# EAGLE board waterlevel (EAGLE 6.2)
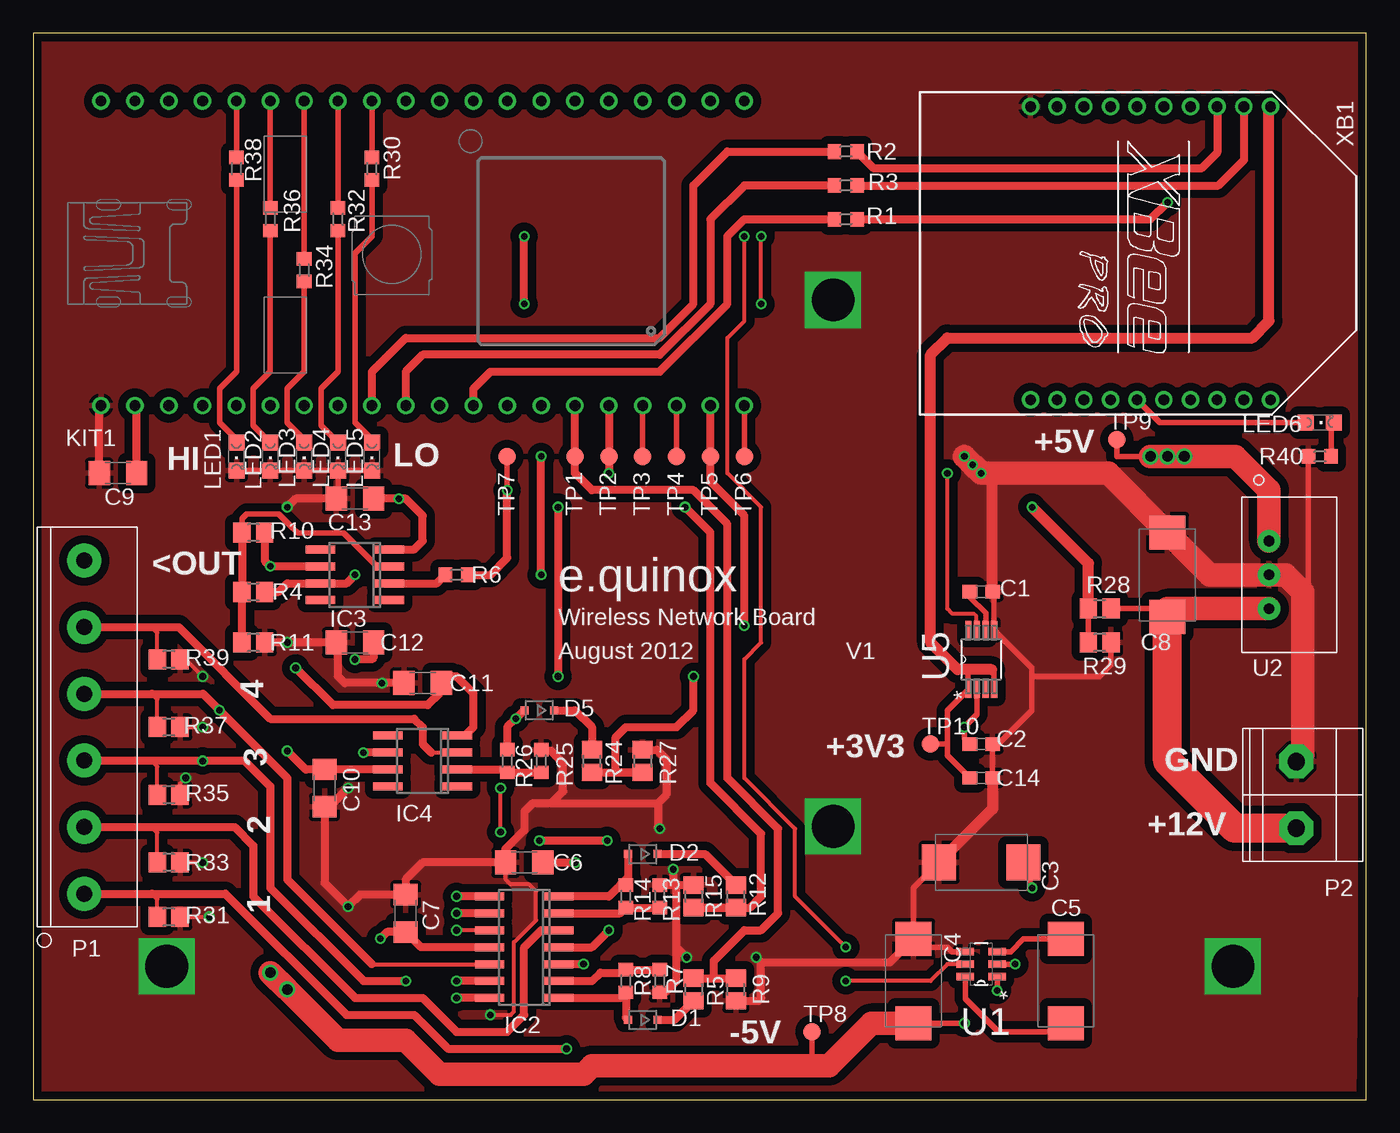
[diagram p0: board, top side]
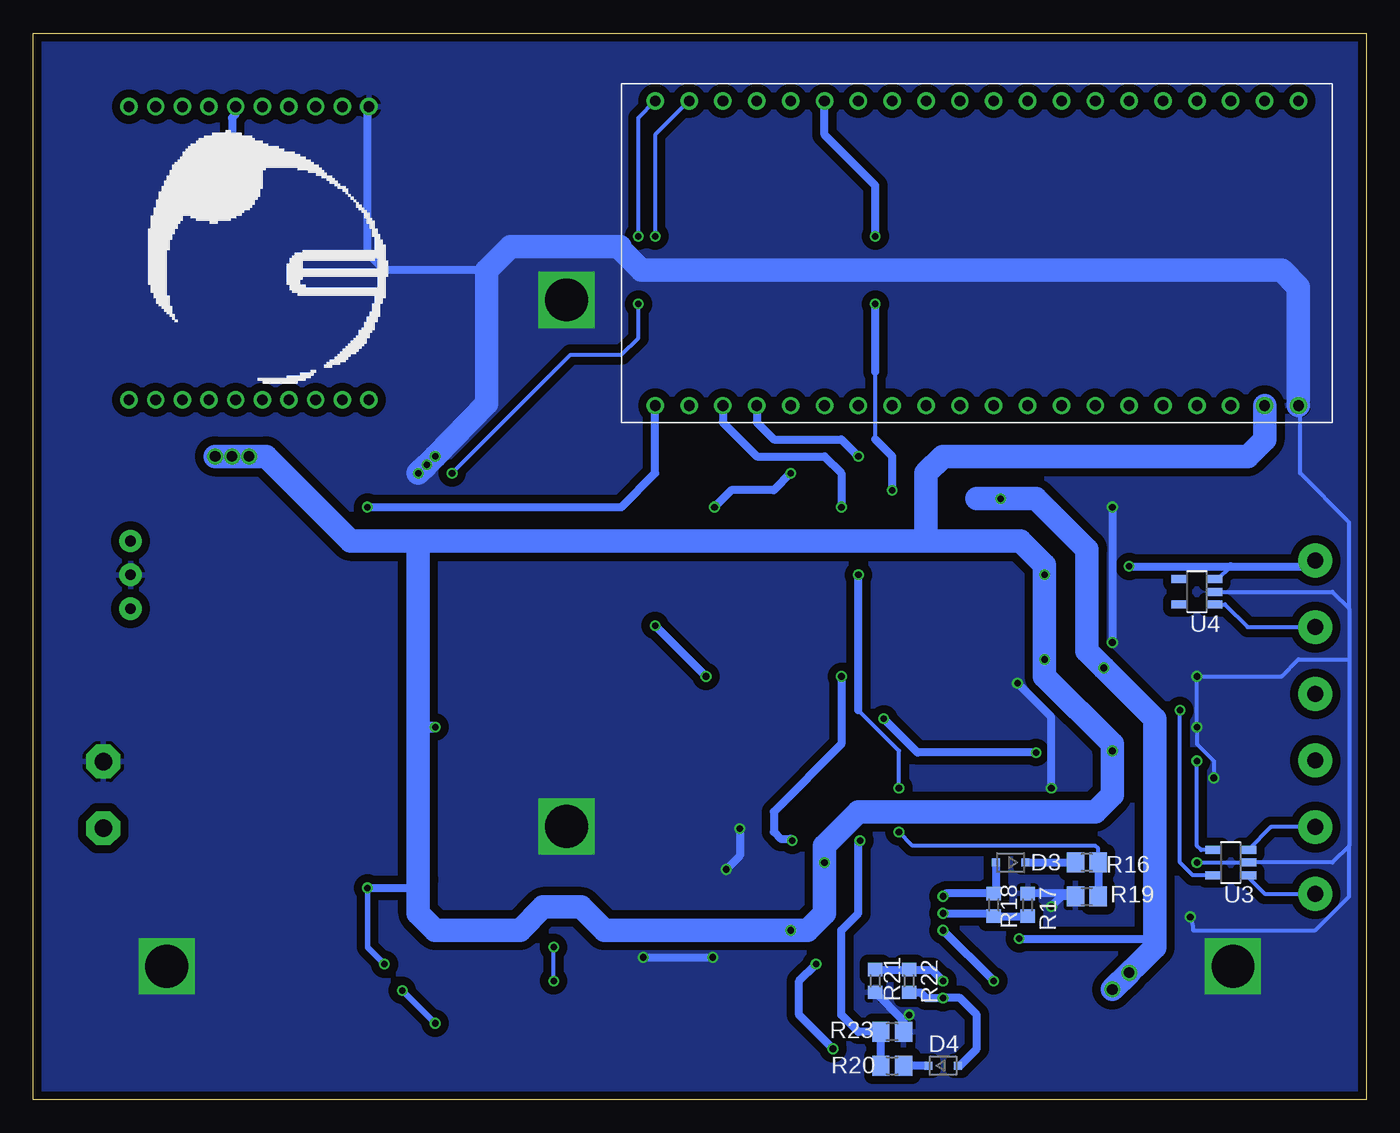
[diagram p1: board, bottom side, seen from below]

Size 100 x 80 mm. Coordinates in mm from the lower left corner, seen from the top.
Outline: 0,0 100,0 100,80 0,80 0,0
Copper layers (1*16): Top 0.035mm / dielectric 1.5mm / Bottom 0.035mm
Design rules: minimum track width 6mil, minimum drill 12mil, track to track 6mil, track to pad 6mil, pad to pad 6mil, via to via 6mil, smd to smd 0mil, copper to edge 10mil, drill to drill 10mil, minimum pad ring 10mil, minimum via ring 6mil, stop-mask expansion 2mil, vias tented up to drill 100mil, thermal gap 10mil

## Footprints (pad centres in the part's own frame; a part is rotated, then mirrored left to right if it is on the bottom)
C0603 = smd 1.1 x 1: 1 -0.85,0; 2 0.85,0
D/7343-31R = smd 2.55 x 2.7: + 3.175,0; - -3.175,0
C1206 = smd 1.6 x 1.8: 1 -1.4,0; 2 1.4,0
SOD323-R = smd 0.6 x 0.6: A 1.1,0; C -1.1,0
SO14 = smd 0.6 x 2.2: 1 -3.81,-2.6; 2 -2.54,-2.6; 3 -1.27,-2.6; 4 0,-2.6; 5 1.27,-2.6; 6 2.54,-2.6; 7 3.81,-2.6; 8 3.81,2.6; 9 2.54,2.6; 10 1.27,2.6; 11 0,2.6; 12 -1.27,2.6; 13 -2.54,2.6; 14 -3.81,2.6
SO08 = smd 0.6 x 2.2: 1 -1.905,-2.6; 2 -0.635,-2.6; 3 0.635,-2.6; 4 1.905,-2.6; 5 1.905,2.6; 6 0.635,2.6; 7 -0.635,2.6; 8 -1.905,2.6
MBED-KIT = drill 0.8: D+ 11.43,1.27; D- 11.43,3.81; GND -11.43,24.13; IF+ 11.43,16.51; IF- 11.43,19.05; NR -11.43,16.51; P$5 -11.43,13.97; P$6 -11.43,11.43; P$7 -11.43,8.89; P$8 -11.43,6.35; P$9 -11.43,3.81; P$10 -11.43,1.27; P$11 -11.43,-1.27; P$12 -11.43,-3.81; P$13 -11.43,-6.35; P$14 -11.43,-8.89; P$15 -11.43,-11.43; P$16 -11.43,-13.97; P$17 -11.43,-16.51; P$18 -11.43,-19.05; P$19 -11.43,-21.59; P$20 -11.43,-24.13; P$21 11.43,-24.13; P$22 11.43,-21.59; P$23 11.43,-19.05; P$24 11.43,-16.51; P$25 11.43,-13.97; P$26 11.43,-11.43; P$27 11.43,-8.89; P$28 11.43,-6.35; P$29 11.43,-3.81; P$30 11.43,-1.27; RD+ 11.43,11.43; RD- 11.43,13.97; TD+ 11.43,6.35; TD- 11.43,8.89; VB -11.43,19.05; VIN -11.43,21.59; VOUT 11.43,24.13; VU 11.43,21.59
CHIPLED_0805 = smd 1.2 x 1.2: A 0,-1.05; C 0,1.05
CAMDEN-CTB5000 = drill 1.2 pad 2.54: 1 -12.5,0; 2 -7.5,0; 3 -2.5,0; 4 2.5,0; 5 7.5,0; 6 12.5,0
CTB1500-2 = drill 1.3 pad 2.54 octagon: P$1 -2.5,0.5; P$2 2.5,0.5
R0603 = smd 1 x 1.1: 1 -0.85,0; 2 0.85,0
R0805 = smd 1.3 x 1.5: 1 -0.85,0; 2 0.85,0
TP13R = smd 1.3 x 1.3: TP 0,0
SOP95P275X110-6N = smd 1.321 x 0.559: 1 -1.194,0.94; 2 -1.194,0; 3 -1.194,-0.94; 4 1.194,-0.94; 5 1.194,0; 6 1.194,0.94
XP-SR-SERIES = drill 0.8 pad 1.676: 1 2.54,0; 2 0,0; 3 -2.54,0
SOT23-5 = smd 0.6 x 1.2: 1 -0.95,-1.306; 2 0,-1.306; 3 0.95,-1.306; 4 0.95,1.306; 5 -0.95,1.306
SOP65P490X110-8N = smd 1.372 x 0.457: 1 -2.21,0.965; 2 -2.21,0.33; 3 -2.21,-0.33; 4 -2.21,-0.965; 5 2.21,-0.965; 6 2.21,-0.33; 7 2.21,0.33; 8 2.21,0.965
XBEE-PRO = drill 0.8 pad 1.27: 1 -11,9; 2 -11,7; 3 -11,5; 4 -11,3; 5 -11,1; 6 -11,-1; 7 -11,-3; 8 -11,-5; 9 -11,-7; 10 -11,-9; 11 11,-9; 12 11,-7; 13 11,-5; 14 11,-3; 15 11,-1; 16 11,1; 17 11,3; 18 11,5; 19 11,7; 20 11,9

## Placement (x,y rotation side)
C1  33nF  [C0603]  71.12,38.1 0 top
C2  2.2u  [C0603]  71.12,26.67 0 top
C3  10uF  [D/7343-31R]  71.12,17.78 0 top
C4  10uF  [D/7343-31R]  66.04,8.89 270 top
C5  10uF  [D/7343-31R]  77.47,8.89 270 top
C6  100n  [C1206]  36.83,17.78 180 top
C7  100n  [C1206]  27.94,13.97 90 top
C8  47uF  [D/7343-31R]  85.09,39.37 270 top
C9  1uF  [C1206]  6.35,46.99 180 top
C10  100n  [C1206]  21.84,23.37 270 top
C11  100n  [C1206]  29.21,31.24 180 top
C12  100n  [C1206]  24.13,34.29 180 top
C13  100n  [C1206]  24.13,45.09 180 top
C14  2.2u  [C0603]  71.12,24.13 0 top
D1  [SOD323-R]  45.72,5.97 180 top
D2  [SOD323-R]  45.72,18.41 180 top
D3  [SOD323-R]  26.67,17.78 180 bottom
D4  [SOD323-R]  31.75,2.54 0 bottom
D5  [SOD323-R]  37.97,29.21 180 top
IC2  MCP604SL  [SO14]  36.83,11.43 90 top
IC3  MCP601SN  [SO08]  24.13,39.37 90 top
IC4  MCP601SN  [SO08]  29.21,25.4 90 top
KIT1  MBED_NXP_LPC1768  [MBED-KIT]  29.21,63.5 90 top
LED1  RED  [CHIPLED_0805]  15.24,48.26 180 top
LED2  AMBER  [CHIPLED_0805]  17.78,48.26 180 top
LED3  GREEN  [CHIPLED_0805]  20.32,48.26 180 top
LED4  GREEN  [CHIPLED_0805]  22.86,48.26 180 top
LED5  GREEN  [CHIPLED_0805]  25.4,48.26 180 top
LED6  [CHIPLED_0805]  96.52,50.8 270 top
P1  CAMDEN-CTB5000/6  [CAMDEN-CTB5000]  3.81,27.94 90 top
P2  CTB1500/2  [CTB1500-2]  95.25,22.86 90 top
R1  33  [R0603]  60.96,66.04 0 top
R2  33  [R0603]  60.96,71.12 0 top
R3  33  [R0603]  60.96,68.58 0 top
R4  1k  [R0805]  16.51,38.1 0 top
R5  1k  [R0805]  49.53,8.26 270 top
R6  0  [R0603]  31.75,39.37 180 top
R7  DNP  [R0603]  46.99,8.89 90 top
R8  0  [R0603]  44.45,8.89 270 top
R9  1k  [R0805]  52.7,8.26 90 top
R10  100k  [R0805]  16.51,42.55 180 top
R11  1k  [R0805]  16.51,34.29 180 top
R12  1k  [R0805]  52.7,15.24 90 top
R13  DNP  [R0603]  46.99,15.24 270 top
R14  0  [R0603]  44.45,15.24 90 top
R15  1k  [R0805]  49.53,15.24 270 top
R16  1k  [R0805]  20.95,17.78 180 bottom
R17  DNP  [R0603]  25.4,14.61 270 bottom
R18  0  [R0603]  27.94,14.61 90 bottom
R19  1k  [R0805]  20.95,15.24 0 bottom
R20  1k  [R0805]  35.56,2.54 0 bottom
R21  DNP  [R0603]  36.83,8.89 90 bottom
R22  0  [R0603]  34.29,8.89 270 bottom
R23  1k  [R0805]  35.56,5.08 180 bottom
R24  1k  [R0805]  41.91,25.4 90 top
R25  DNP  [R0603]  38.1,25.4 270 top
R26  0  [R0603]  35.56,25.4 90 top
R27  1k  [R0805]  45.72,25.4 270 top
R28  3k  [R0805]  80.01,36.83 0 top
R29  1k  [R0805]  80.01,34.29 180 top
R30  200  [R0603]  25.4,69.85 90 top
R31  1M  [R0805]  10.16,13.7 180 top
R32  200  [R0603]  22.86,66.04 90 top
R33  1M  [R0805]  10.16,17.78 180 top
R34  200  [R0603]  20.32,62.23 90 top
R35  1M  [R0805]  10.16,22.86 180 top
R36  200  [R0603]  17.78,66.04 90 top
R37  1M  [R0805]  10.16,27.94 180 top
R38  200  [R0603]  15.24,69.85 90 top
R39  1M  [R0805]  10.16,33.02 180 top
R40  200  [R0603]  96.52,48.26 0 top
TP1  TPTP13R  [TP13R]  40.64,48.26 0 top
TP2  TPTP13R  [TP13R]  43.18,48.26 0 top
TP3  TPTP13R  [TP13R]  45.72,48.26 0 top
TP4  TPTP13R  [TP13R]  48.26,48.26 0 top
TP5  TPTP13R  [TP13R]  50.8,48.26 0 top
TP6  TPTP13R  [TP13R]  53.34,48.26 0 top
TP7  TPTP13R  [TP13R]  35.56,48.26 0 top
TP8  TPTP13R  [TP13R]  58.42,5.08 0 top
TP9  TPTP13R  [TP13R]  81.28,49.53 0 top
TP10  TPTP13R  [TP13R]  67.31,26.67 0 top
U1  NCP1729SN35T1G  [SOP95P275X110-6N]  71.12,10.16 180 top
U2  SR05S05  [XP-SR-SERIES]  92.71,39.37 90 top
U3  VISHAY-VCUT05A4  [SOT23-5]  10.16,17.78 90 bottom
U4  VISHAY-VCUT05A4  [SOT23-5]  12.7,38.1 90 bottom
U5  LP3981IMM-3.3  [SOP65P490X110-8N]  71.12,33.02 90 top
U$2  [EQNXLOGO]  81.28,62.23 0 bottom
XB1  XBEE-PRO  [XBEE-PRO]  83.82,63.5 270 top

## Library data of the parts
C1 C6 C7 C9-C13 R1-R40 = resistor
C2 C14 = resistor; FARNELL: 1759400
C3-C5 C8 = resistor; FARNELL: 2112950
D1-D5 = diode; FARNELL: 1907691; PART: RB751V40
IC2-IC4 = linear
KIT1 = MBED_v2.1
LED1-LED6 = led
P1 = connectors-terminal; FARNELL: CN11531
P2 U$2 = eko-parts
TP1-TP10 = testpad
U1 = eko-parts; MPN: NCP1729SN35T1G; OC_FARNELL: 1652414; OC_NEWARK: 45J1868; PACKAGE: TSOP-6; SUPPLIER: ON SEMICONDUCTOR
U2 = eko-parts; FARNELL: 1861084
U3 U4 = diodes
U5 = eko-parts; MPN: LP3981IMM-3.3; OC_FARNELL: 1685563; OC_NEWARK: 41K7899; PACKAGE: MSOP-8; SUPPLIER: NationalSemiconductor
XB1 = maxstream; MPN: XBP24-AWI-001; OC_FARNELL: 1337916; OC_NEWARK: 42M2667

## Nets
!XBEE_RESET!: KIT1.P$12 R1.1
+3V3: C14.1 TP10.TP U5.1 U5.4 XB1.1
+5V: C2.1 C3.+ C6.1 C9.1 C10.1 C12.1 IC2.4 IC3.7 IC4.7 KIT1.VIN R4.2 TP9.TP U1.2 U2.1 U5.2
+12V: C8.+ P2.P$1 R28.2 U2.3
-5V: C4.+ C7.1 C11.1 C13.1 IC2.11 IC3.4 IC4.4 TP8.TP U1.1
BAT_LVL: KIT1.P$20 R28.1 R29.2 TP6.TP
GND: C1.2 C2.2 C3.- C4.- C6.2 C7.2 C8.- C9.2 C10.2 C11.2 C12.2 C13.2 C14.2 KIT1.GND LED1.C LED2.C LED3.C LED4.C LED5.C P2.P$2 R7.1 R9.1 R11.1 R13.1 R15.1 R17.1 R19.1 R21.1 R23.1 R25.1 R27.1 R29.1 R31.1 R33.1 R35.1 R37.1 R39.1 R40.1 U1.4 U2.2 U3.2 U4.2 U5.5 XB1.10
LED1: KIT1.RD- R38.2
LED2: KIT1.RD+ R36.2
LED3: KIT1.TD- R34.2
LED4: KIT1.TD+ R32.2
LED5: KIT1.D- R30.2
LVL1: KIT1.P$15 R5.1 R9.2 TP1.TP
LVL2: KIT1.P$16 R12.1 R15.2 TP2.TP
LVL3: KIT1.P$17 R16.1 R19.2 TP3.TP
LVL4: KIT1.P$18 R20.1 R23.2 TP4.TP
LVL5: KIT1.P$19 R24.1 R27.2 TP5.TP
MBED_RX: KIT1.P$10 R3.1
MBED_TX: KIT1.P$9 R2.1
N5V_ON: KIT1.P$22 U1.5
N$1: IC3.2 R6.2
N$2: D2.A IC2.7 R14.2
N$3: D3.A IC2.8 R18.2
N$4: D4.A IC2.14 R22.2
N$5: D5.A IC4.6 R26.2
N$6: IC4.2 R25.2 R26.1
N$7: IC2.13 R21.2 R22.1
N$8: IC2.9 R17.2 R18.1
N$9: IC2.6 R13.2 R14.1
N$10: IC2.2 R7.2 R8.1
N$11: C5.+ U1.6
N$12: D2.C R12.2
N$13: C5.- U1.3
N$14: D1.C R5.2
N$15: D1.A IC2.1 R8.2
N$16: D3.C R16.2
N$17: LED6.A XB1.15
N$18: D4.C R20.2
N$19: R1.2 XB1.5
N$20: D5.C R24.2
N$21: R2.2 XB1.3
N$22: R3.2 XB1.2
N$23: IC3.3 R4.1 R10.2 R11.2
N$24: LED6.C R40.2
N$25: LED5.A R30.1
N$26: LED4.A R32.1
N$27: LED3.A R34.1
N$28: C1.1 U5.6
N$29: LED2.A R36.1
N$30: LED1.A R38.1
NR: KIT1.NR
SENSOR_IN_1: IC2.3 P1.1 R31.2 U3.1
SENSOR_IN_2: IC2.5 P1.2 R33.2 U3.3
SENSOR_IN_3: IC2.10 P1.3 R35.2 U3.4
SENSOR_IN_4: IC2.12 P1.4 R37.2 U3.5
SENSOR_IN_5: IC4.3 P1.5 R39.2 U4.1
SQR_IN: KIT1.P$26 R6.1 TP7.TP
SQR_OUT_AC: IC3.6 P1.6 R10.1 U4.3
VB: KIT1.VB
VO: KIT1.VOUT
VU: KIT1.VU
XBEE_PWR_ON: KIT1.P$21 U5.7

## Tracks (layer width: path | path; a pad name or v marks a point on that pad's centre or on a via)
!XBEE_RESET!
  Top 0.61: KIT1.P$12 33.02,53.34 34.29,54.61 46.99,54.61 52.07,59.69 52.07,64.77 53.34,66.04 R1.1
+3V3
  Top 0.406: 68.58,26.67 68.58,29.21 70.16,30.79 U5.1 70.1,30.89 70.1,32 70.48,32.26 71.88,32.26 72.08,32.05 U5.4 | 68.58,26.67 68.58,25.82 C14.1 | TP10.TP 68.58,26.67
  Top 0.813: 71.88,32.26 69.34,32.26 67.31,34.29 67.31,55.88 68.58,57.15 91.44,57.15 92.71,58.42 92.71,74.39 XB1.1
+5V  (via drill 0.5, 0.8)
  Top 0.406: U1.2 v73.66,10.16 | v74.93,15.88 C3.+ | U5.2 70.79,28.88 v69.85,27.94 69.85,27.09 C2.1 | TP9.TP 81.28,48.26 v83.82,48.26
  Top 0.61: IC4.7 C10.1 20.44,24.77 v19.05,26.16 | R4.2 18.41,38.1 19.05,38.73 IC3.7 23.5,38.73 v24.13,39.37 | C9.1 7.75,51.94 KIT1.VIN | C6.1 v40.64,17.78 | IC2.4 41.91,11.43 v43.18,12.7 | C12.1 25.53,33.15 25.4,33.02 v24.13,33.02
  Top 1.778: U2.1 92.71,45.72 90.17,48.26 v86.36,48.26 v85.09,48.26 v83.82,48.26
  Bottom 0.406: v73.66,10.16 74.93,11.43 v74.93,15.88
  Bottom 0.61: v74.93,15.88 71.75,15.88 71.12,16.51
  Bottom 0.813: 71.12,27.94 v69.85,27.94
  Bottom 1.778: v86.36,48.26 82.55,48.26 76.2,41.91 71.12,41.91 | 71.12,41.91 33.02,41.91 | 33.02,41.91 25.93,41.91 24.13,40.11 v24.13,39.37 v24.13,33.02 24.13,31.75 19.05,26.67 v19.05,26.16 19.05,22.86 20.32,21.59 38.1,21.59 40.64,19.05 v40.64,17.78 40.64,13.97 41.91,12.7 v43.18,12.7 57.15,12.7 58.91,14.46 61.74,14.46 63.5,12.7 69.85,12.7 71.12,13.97 71.12,16.51 71.12,27.94 71.12,41.91 | KIT1.VIN 7.62,49.53 8.89,48.26 31.75,48.26 33.02,46.99 33.02,41.91
+12V
  Top 0.406: 85.09,36.83 R28.2
  Top 1.778: U2.3 85.09,36.83 C8.+
  Top 2.184: P2.P$1 90.13,20.36 85.09,25.4 C8.+
-5V  (via drill 0.5, 0.8)
  Top 0.406: U1.1 v72.31,8.18 | C4.+ v69.85,5.71 | TP8.TP 58.42,2.54
  Top 0.61: IC2.11 29.08,11.43 C7.1 26.54,12.57 v26.04,12.06 | IC4.4 32.38,27.3 33.02,27.94 33.02,30.48 31.75,31.75 31.12,31.75 C11.1 30.61,31.62 30.48,31.75 30.48,30.48 29.59,29.59 22.48,29.59 v19.68,32.38 | C13.1 v27.43,45.09 27.94,45.09 29.21,43.81 29.21,41.91 28.57,41.27 IC3.4
  Top 1.778: C4.+ 62.87,5.71 59.69,2.54 58.42,2.54 41.91,2.54 41.27,1.91 30.48,1.91 27.94,4.45 22.86,4.45 v19.05,8.26 v17.78,9.53
  Bottom 0.406: v69.85,5.71 v72.31,8.18
  Bottom 0.61: v26.04,12.06 16.51,12.06 15.88,12.7
  Bottom 1.778: v17.78,9.53 v19.05,8.26 15.88,11.43 15.88,12.7 15.88,28.57 v19.68,32.38 20.95,33.66 20.95,41.27 24.77,45.09 v27.43,45.09 29.21,45.09
BAT_LVL  (via drill 0.5)
  Top 0.406: R28.1 R29.2 | TP6.TP KIT1.P$20
  Top 0.813: R28.1 79.16,40.22 v74.93,44.45
  Bottom 0.61: v74.93,44.45 55.88,44.45 53.34,46.99 KIT1.P$20
GND  (via drill 0.5, 3.2)
  Top 0.305: v34.29,6.35 35.81,6.35 36.07,6.6 36.07,11.81 37.72,13.46 37.72,15.62 37.21,16.13 35.81,16.13 35.43,16.51 C6.2 | R31.1 v13.2,13.7 | R33.1 v12.7,17.78 | R35.1 11.01,23.71 v11.43,24.13 | R37.1 v12.7,27.94 | R39.1 11.43,33.02 v12.7,31.75
  Top 0.406: U1.4 68.91,11.1 68.58,11.43 66.67,11.43 C4.- 66.04,15.88 C3.- | C1.2 72.08,37.98 U5.5 74.93,32.38 74.93,31.75 | C14.2 C2.2 72.39,26.67 74.93,29.21 74.93,31.75 | R29.1 80.86,32.6 80.01,31.75 74.93,31.75 | LED1.C LED2.C LED3.C LED4.C | LED4.C LED5.C | LED4.C 22.86,45.22 C13.2 | R40.1 95.67,37.25 95.25,36.83
  Top 0.61: C9.2 4.95,51.94 KIT1.GND | C11.2 v26.16,31.24 23.37,31.24 22.86,31.75 22.86,34.16 C12.2 v19.05,34.29 R11.1 | 38.86,22.23 39.75,23.11 39.75,25.27 38.86,26.16 38.19,26.16 R25.1 | R27.1 46.77,26.25 47.5,25.53 47.5,22.86 46.86,22.23 | 38.86,22.23 46.86,22.23 | R13.1 48.26,16.09 | 48.26,16.09 R15.1 | R7.1 47.41,8.04 48.26,8.89 48.26,11.43 | 48.26,11.43 48.26,16.09 | R9.1 54.4,7.41 54.61,7.62 54.61,10.29 | 54.61,10.29 v54.23,10.67 | v49.02,10.67 48.26,11.43 | v23.62,23.37 22.22,21.97 C10.2 21.84,16.26 v23.62,14.48 24.51,15.37 C7.2 27.94,16.51 29.21,17.78 C6.2 35.43,18.79 36.83,20.19 36.83,21.59 37.47,22.23 38.86,22.23 | C13.2 19.68,45.09 v19.05,44.45 | 46.86,22.23 46.86,20.45 v46.99,20.32 | v48.01,17.27 48.01,16.34 48.26,16.09 | 54.61,10.29 64.26,10.29 C4.-
  Top 0.813: C1.2 71.97,46.57 72.39,46.99 | C14.2 71.97,21.8 C3.-
  Top 1.778: P2.P$2 95.25,25.86 95.25,36.83 95.25,38.1 93.98,39.37 U2.2 88.27,39.37 C8.- 80.64,46.99 72.39,46.99 v71.12,46.99 v70.48,47.62 v69.85,48.26
  Bottom 0.305: 34.71,5.92 34.71,5.93 v34.29,6.35 | U4.2 2.54,38.1 1.27,36.83 | 1.27,36.83 1.27,33.02 | 1.27,33.02 1.27,19.05 | 1.27,19.05 2.54,17.78 U3.2 v12.7,17.78 | 1.27,36.83 1.27,43.31 C9.2 4.95,51.94 KIT1.GND | v11.43,24.13 11.43,25.4 12.7,26.67 v12.7,27.94 v12.7,31.75 6.35,31.75 5.08,33.02 1.27,33.02 | v13.2,13.7 13,13 13,12.7 3.81,12.7 1.27,15.24 1.27,19.05
  Bottom 0.61: R23.1 34.71,5.92 R21.1 | R17.1 22.02,15.46 R19.1 22.86,15.24 v23.62,14.48 | v54.23,10.67 v49.02,10.67 | v23.62,23.37 23.62,28.7 v26.16,31.24 | v19.05,44.45 v19.05,34.29 | v46.99,20.32 46.99,18.29 v48.01,17.27 | 56,64 64.27,64 66.04,62.23 73.66,62.23 74.93,63.5 74.93,74.39 XB1.10
  Bottom 1.778: KIT1.GND 5.08,60.96 6.35,62.23 54.38,62.23 56,63.85 56,64 64.2,64 66,62.2 66,52.23 v69.85,48.26 v70.48,47.62 v71.12,46.99
  other vias: 60,60 10,10 90,10 60,20.5
  pour Bottom (isolate 0.61): 0,80.01 99.83,80.01 100.33,0 0,0
  pour Top (isolate 0.61): 0,80.01 0,0 99.06,0 100.06,80.01
LED1
  Top 0.406: KIT1.RD- R38.2
LED2
  Top 0.406: KIT1.RD+ R36.2
LED3
  Top 0.406: KIT1.TD- R34.2
LED4
  Top 0.406: KIT1.TD+ R32.2
LED5
  Top 0.406: KIT1.D- R30.2
LVL1
  Top 0.61: R9.2 R5.1 51.02,9.11 51.05,9.14 51.05,10.41 53.34,12.7 54.61,12.7 55.88,13.97 55.88,20.32 52.07,24.13 52.07,43.18 49.53,45.72 41.91,45.72 40.64,46.99 TP1.TP KIT1.P$15
LVL2  (via drill 0.5)
  Top 0.61: R12.1 R15.2 53.76,14.39 54.61,15.24 54.61,19.94 50.8,23.75 50.8,42.55 v48.9,44.45 | KIT1.P$16 TP2.TP v43.18,46.99
  Bottom 0.61: v43.18,46.99 44.45,45.72 47.62,45.72 v48.9,44.45
LVL3  (via drill 0.5)
  Top 0.305: v35.05,20.07 v35.05,23.37
  Top 0.406: TP3.TP KIT1.P$17
  Top 0.61: v38.1,39.37 v38.1,48.26
  Bottom 0.305: R16.1 20.11,18.84 20.32,19.05 34.04,19.05 v35.05,20.07 | v35.05,23.37 35.05,26.16 38.1,29.21
  Bottom 0.61: R16.1 R19.2 | 38.1,29.21 v38.1,39.37 | KIT1.P$17 45.72,50.8 44.45,49.53 39.37,49.53 v38.1,48.26
LVL4  (via drill 0.5)
  Top 0.406: TP4.TP KIT1.P$18
  Top 0.61: v37.97,19.43 v43.05,19.43 | v39.37,44.45 v39.37,31.75
  Bottom 0.61: R20.1 R23.2 38.1,5.08 39.37,6.35 39.37,12.7 38.1,13.97 38.1,19.3 v37.97,19.43 | KIT1.P$18 48.26,50.8 45.72,48.26 40.64,48.26 39.37,46.99 v39.37,44.45 | v39.37,31.75 39.37,26.67 44.45,21.59 44.45,20.07 43.94,19.56 43.18,19.56 v43.05,19.43
LVL5  (via drill 0.5)
  Top 0.61: R24.1 R27.2 43.78,24.55 43.69,24.64 43.69,27.18 44.45,27.94 48.26,27.94 49.53,29.21 v49.53,31.75 | v53.34,35.56 53.34,43.81 50.8,46.35 TP5.TP KIT1.P$19
  Bottom 0.61: v49.53,31.75 v53.34,35.56
MBED_RX
  Top 0.61: R3.1 53.34,68.58 50.8,66.04 50.8,59.69 46.99,55.88 29.21,55.88 27.94,54.61 KIT1.P$10
MBED_TX
  Top 0.61: KIT1.P$9 25.4,54.61 27.94,57.15 46.99,57.15 49.53,59.69 49.53,68.58 52.07,71.12 R2.1
N5V_ON  (via drill 0.5)
  Top 0.305: U1.5 68.58,10.16 67.31,8.89 v60.96,8.89 | v60.96,11.43 57.15,15.24 57.15,20.32 53.34,24.13 53.34,33.02 54.61,34.29 54.61,44.45 52.07,46.99 52.07,57.15 53.34,58.42 v53.34,64.77
  Bottom 0.305: KIT1.P$22 53.34,72.39 v53.34,64.77 | v60.96,8.89 v60.96,11.43
N$1
  Top 0.61: IC3.2 30.27,38.73 R6.2
N$2
  Top 0.61: R14.2 44.03,16.09 | 44.03,16.09 43.81,15.88 43.18,15.24 IC2.7 | D2.A 44.62,16.68 44.03,16.09
N$3  (via drill 0.5)
  Top 0.61: IC2.8 v31.75,15.24
  Bottom 0.61: v31.75,15.24 31.54,15.46 R18.2 27.77,15.62 D3.A
N$4  (via drill 0.5)
  Top 0.61: IC2.14 v31.75,7.62
  Bottom 0.61: R22.2 33.44,8.04 33.02,7.62 v31.75,7.62 30.48,7.62 29.21,6.35 29.21,3.81 30.48,2.54 D4.A
N$5  (via drill 0.5)
  Top 0.61: D5.A 36.83,29.21 v36.2,28.57 35.56,27.94 R26.2 | IC4.6 v24.77,26.04
  Bottom 0.61: v24.77,26.04 33.66,26.04 v36.2,28.57
N$6
  Top 0.61: IC4.2 35.34,24.77 R26.1 R25.2
N$7  (via drill 0.5)
  Top 0.61: IC2.13 v31.75,8.89
  Bottom 0.61: R21.2 R22.1 32.6,9.74 v31.75,8.89
N$8  (via drill 0.5)
  Top 0.61: IC2.9 v31.75,13.97
  Bottom 0.61: v31.75,13.97 28.16,13.97 R18.1 R17.2
N$9
  Top 0.61: IC2.6 44.03,13.97 R14.1 R13.2
N$10
  Top 0.61: IC2.2 41.91,8.89 42.55,9.53 44.23,9.53 R8.1 R7.2
N$11
  Top 0.406: U1.6 69.93,7.54 72.39,5.08 76.83,5.08 C5.+
N$12
  Top 0.61: D2.C 50.38,18.41 R12.2
N$13
  Top 0.406: C5.- 74.3,12.06 73.33,11.1 U1.3
N$14
  Top 0.61: D1.C 48.09,5.97 R5.2
N$15
  Top 0.61: IC2.1 44.03,7.62 R8.2 44.45,6.14 D1.A
N$16
  Bottom 0.61: D3.C R16.2
N$17
  Top 0.406: LED6.A 84.52,50.8 XB1.15
N$18
  Bottom 0.61: D4.C R20.2
N$19  (via drill 0.5)
  Top 0.61: R1.2 83.82,66.04 v85.09,67.31
  Bottom 0.61: XB1.5 84.82,73.93 85.09,73.66 v85.09,67.31
N$20
  Top 0.61: D5.C 40.64,29.21 41.91,27.94 R24.2
N$21
  Top 0.61: XB1.3 88.82,71.04 87.63,69.85 63.08,69.85 R2.2
N$22
  Top 0.61: R3.2 88.9,68.58 90.82,70.5 XB1.2
N$23
  Top 0.406: IC3.3 25.79,40.01 24,41.79 23.29,42.5 19.86,42.5 19.5,42.86 18.86,43.5 18.41,43.94 16,43.94 15.66,43.6 R10.2
  Top 0.61: R11.2 R4.1 R10.2
N$24
  Top 0.406: R40.2 97.37,50.6 LED6.C
N$25
  Top 0.406: LED5.A 25.4,49.53 24.13,50.8 24.13,63.5 25.4,64.77 R30.1
N$26
  Top 0.406: R32.1 22.86,54.61 21.59,53.34 21.59,50.58 LED4.A
N$27
  Top 0.406: LED3.A 20.32,49.53 19.05,50.8 19.05,53.34 20.32,54.61 R34.1
N$28
  Top 0.406: C1.1 70.27,37.68 71.45,36.5 U5.6
N$29
  Top 0.406: R36.1 17.78,54.61 16.51,53.34 16.51,50.58 LED2.A
N$30
  Top 0.406: LED1.A 15.24,49.53 13.97,50.8 13.97,53.34 15.24,54.61 R38.1
SENSOR_IN_1  (via drill 0.5)
  Top 0.305: R31.2 9.31,15.02 8.89,15.44
  Top 0.61: P1.1 8.89,15.44 14.4,15.44 23.5,6.35 28.57,6.35 31.11,3.81 v40.01,3.81 | v41.27,10.16 IC2.3
  Bottom 0.305: U3.1 8.85,16.67 7.62,15.44 P1.1
  Bottom 0.61: v40.01,3.81 42.55,6.35 42.55,8.89 v41.27,10.16
SENSOR_IN_2
  Top 0.305: R33.2 9.31,20.02 8.89,20.44 | 38.1,12.7 IC2.5
  Top 0.61: P1.2 8.89,20.44 15.12,20.44 16.51,19.05 16.51,15.24 24.13,7.62 29.21,7.62 31.75,5.08 35.56,5.08 36.83,6.35 36.83,11.43 38.1,12.7
  Bottom 0.305: P1.2 7.14,20.44 U3.3
SENSOR_IN_3  (via drill 0.5)
  Top 0.305: 15.84,25.44 12.74,25.44 v12.7,25.4 | R35.2 9.31,24.98 8.89,25.4 8.89,25.44 | IC2.10 v31.75,12.7
  Top 0.61: P1.3 8.89,25.44 15.84,25.44 17.78,23.5 17.78,15.88 24.77,8.89 v27.94,8.89
  Bottom 0.305: U3.4 12.38,18.73 12.7,19.05 v12.7,25.4 12.7,25.44
  Bottom 0.61: v27.94,8.89 v31.75,12.7
SENSOR_IN_4  (via drill 0.5)
  Top 0.305: R37.2 9.31,30.02 8.89,30.44 | 25.4,10.16 IC2.12
  Top 0.61: P1.4 8.89,30.44 12.74,30.44 v13.97,29.21 19.05,24.13 19.05,16.51 25.4,10.16
  Bottom 0.305: U3.5 13.02,16.83 13.97,17.78 v13.97,29.21
SENSOR_IN_5
  Top 0.305: R39.2 9.31,35.02 8.89,35.44 | 29.84,26.04 IC4.3
  Top 0.61: P1.5 8.89,35.44 10.91,35.44 17.78,28.57 28.57,28.57 29.21,27.94 29.21,26.67 29.84,26.04
  Bottom 0.305: U4.1 10.6,37.15 8.89,35.44 P1.5
SQR_IN  (via drill 0.5)
  Top 0.406: TP7.TP v35.56,45.72
  Top 0.61: R6.1 34.29,39.37 35.56,40.64 v35.56,45.72 | v36.83,59.69 v36.83,64.77
  Bottom 0.305: 36.83,49.53 36.83,54.61
  Bottom 0.61: v35.56,45.72 TP7.TP 36.83,49.53 | 36.83,54.61 v36.83,59.69 | v36.83,64.77 36.83,68.58 40.64,72.39 KIT1.P$26
SQR_OUT_AC  (via drill 0.5)
  Top 0.61: IC3.6 v17.78,40.01 17.36,40.42 R10.1
  Bottom 0.305: U4.3 11.12,39.05 10.16,40.01
  Bottom 0.61: v17.78,40.01 10.16,40.01 4.25,40.01 P1.6
XBEE_PWR_ON  (via drill 0.5)
  Top 0.305: U5.7 70.79,35.89 70.74,35.89 70.74,36.27 70.56,36.45 68.96,36.45 68.58,36.83 v68.58,46.99 | v54.61,59.69 v54.61,64.77
  Bottom 0.305: v68.58,46.99 59.69,55.88 55.88,55.88 54.61,57.15 v54.61,59.69 | v54.61,64.77 54.61,73.66 KIT1.P$21

## Text on the board
tPlace: HI | +5V | LO | <OUT | e.quinox | Wireless Network Board | August 2012 | V1 | 4 | +3V3 | 3 | GND | 2 | +12V | 1 | -5V